# Altium PCB PCB2.PcbDoc
Units mil, origin at the board's own origin, x right, y up, seen from the top; angles counter-clockwise.
Board outline 3255 x 2500 mil, 2 copper layers (Top Layer, Bottom Layer); 17 components, 7 nets, 39 pads, 1 vias.
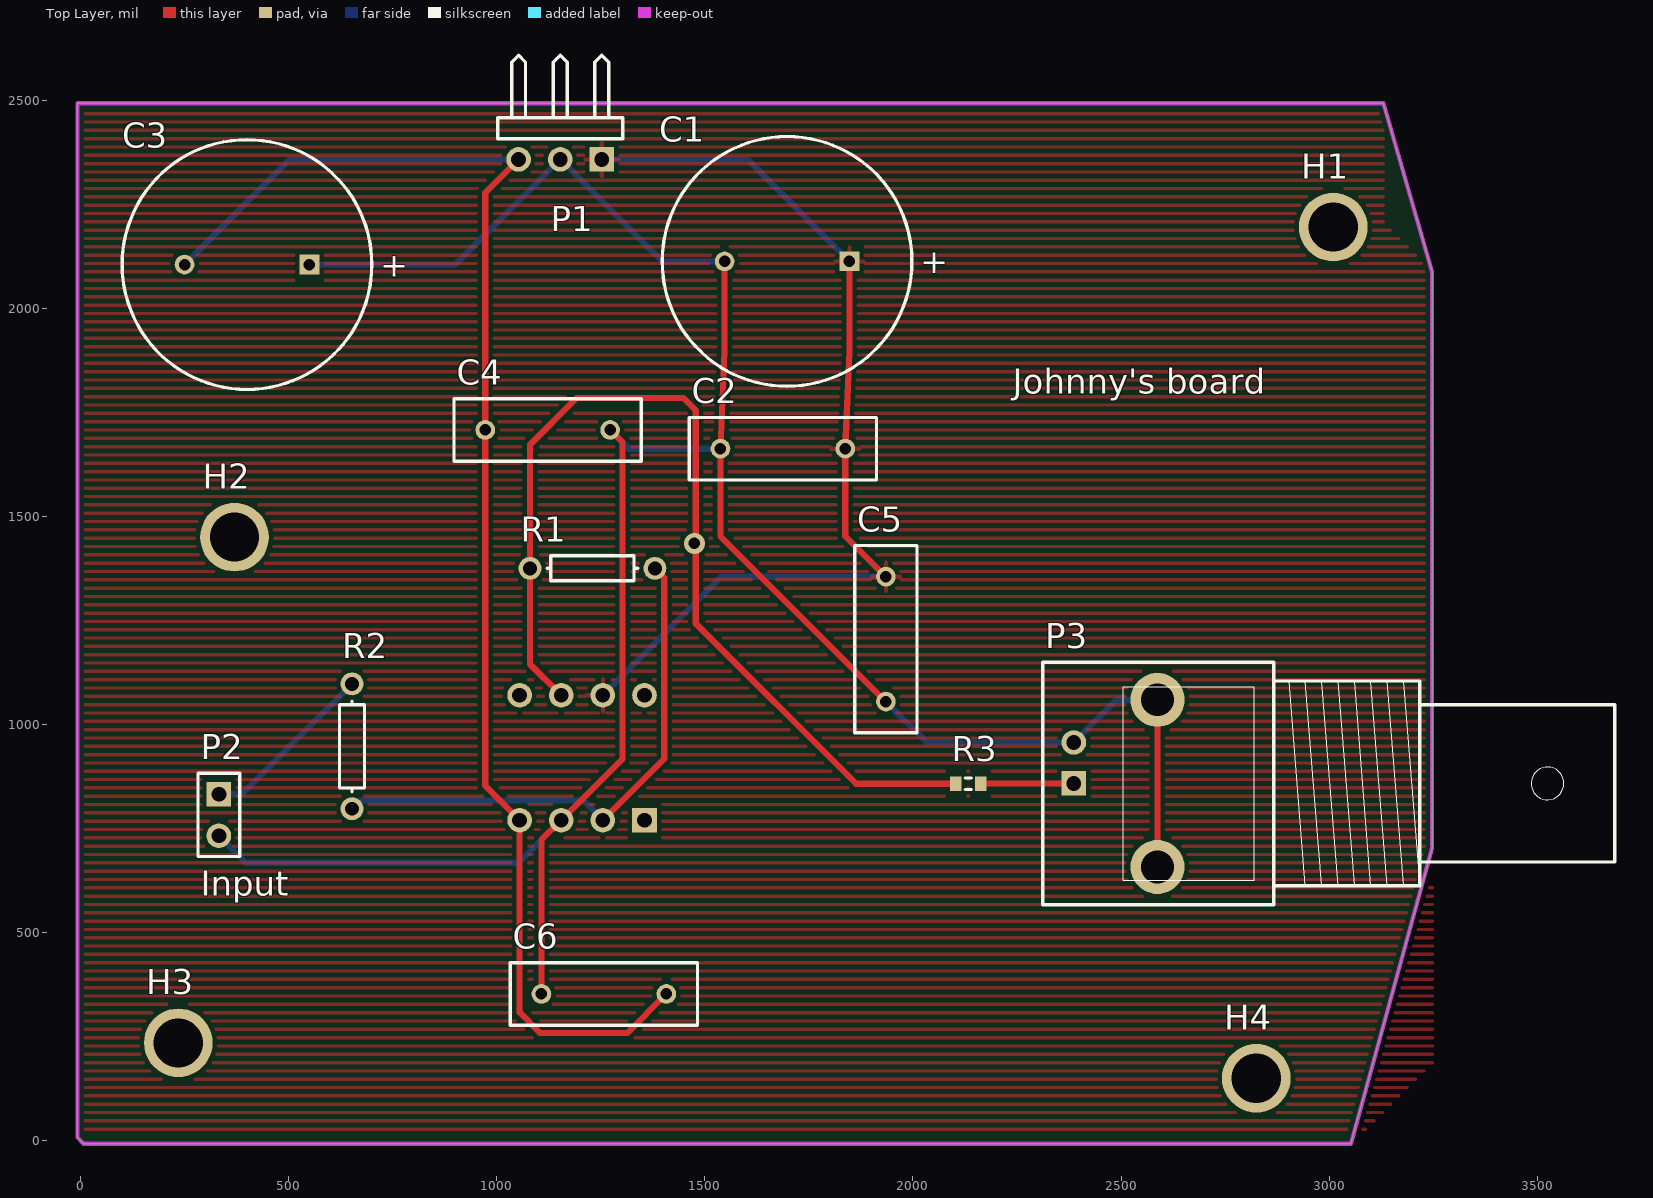
[diagram p0: Top Layer view]
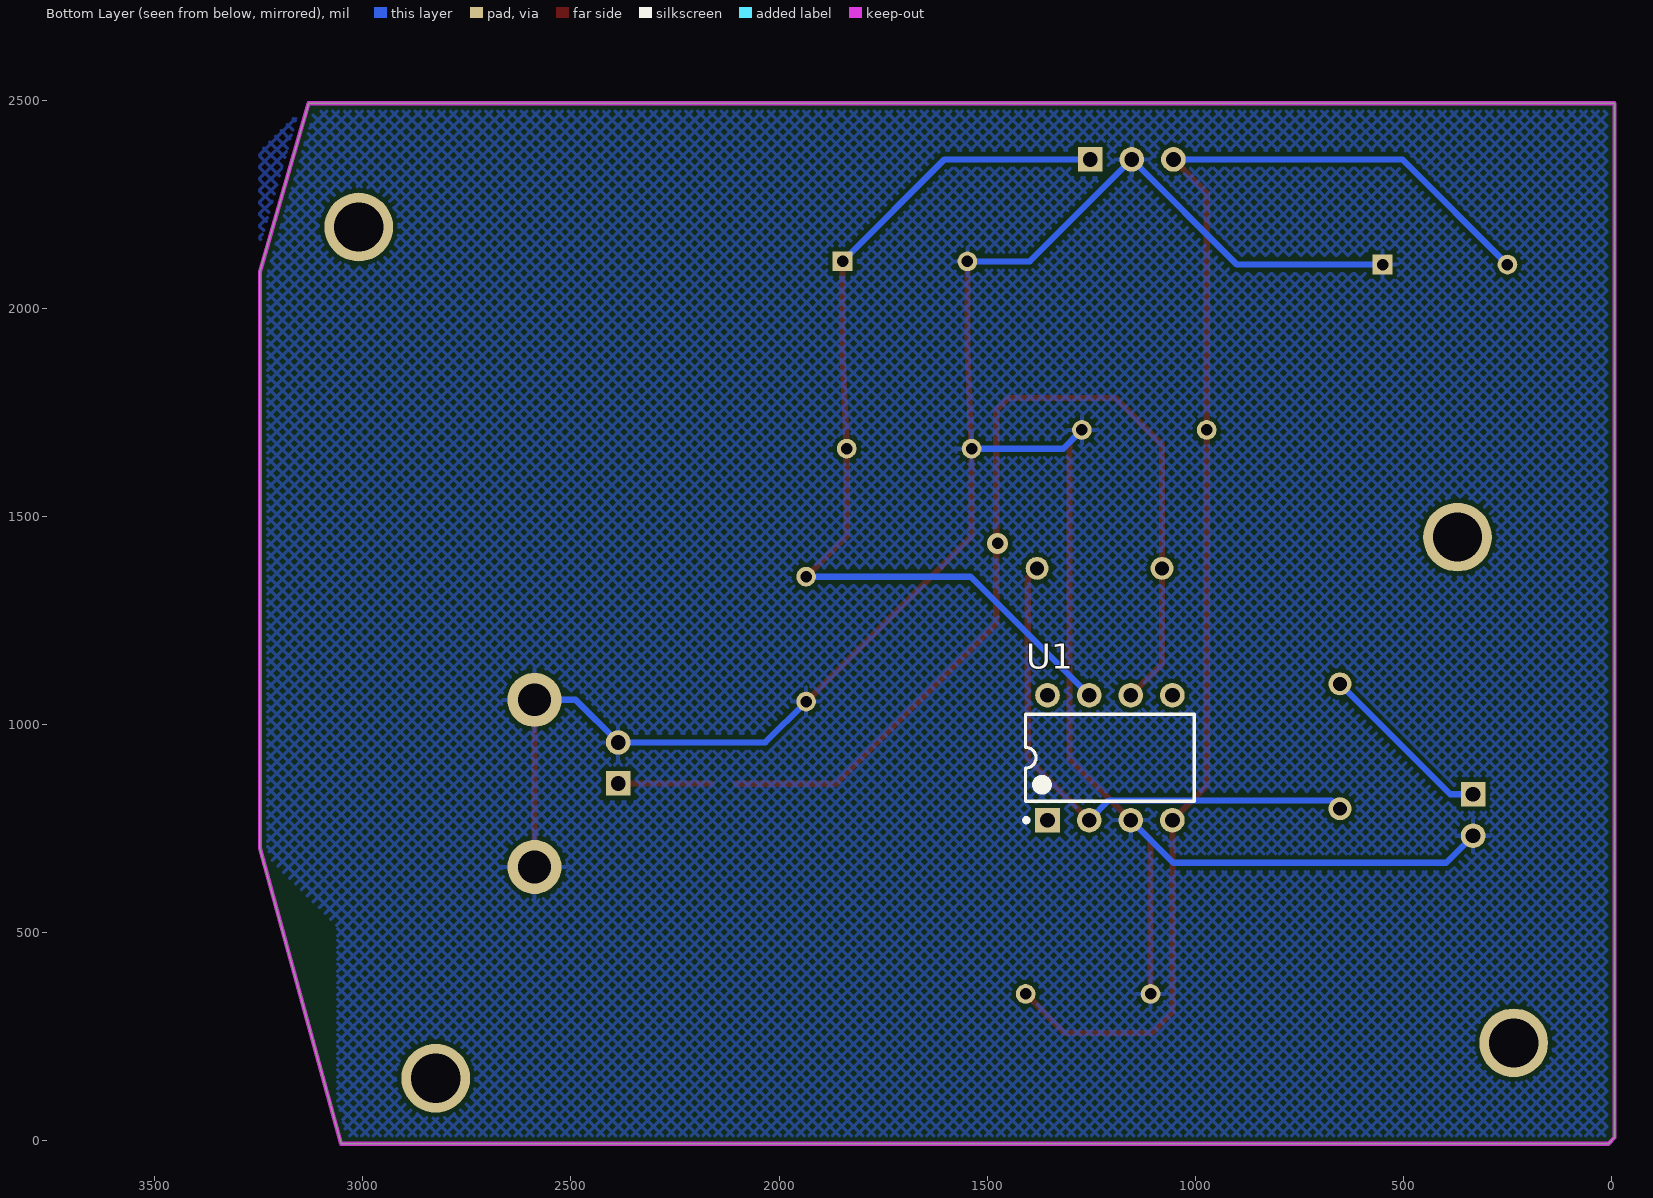
[diagram p1: Bottom Layer view, seen from below]

## Layer stack, top to bottom
Top Solder: solder mask 0.4, Solder Resist, Dk 3.5
Top Layer: signal copper 1.4
Dielectric 1: dielectric 12.6, FR-4, Dk 4.8
Bottom Layer: signal copper 1.4
Bottom Solder: solder mask 0.4, Solder Resist, Dk 3.5

## Board outline
7.5,-7.5 -7.5,7.5 -7.5,2492.5 3130.5,2492.5 3247.5,2087.5 3247.5,702.5 3052.5,-7.5

## Design rules (kind name [scope] priority, off if disabled: settings)
Clearance [All] p1: gap=10 ignorepadtopadclearanceinfootprint=FALSE except(0: Arc-Hole Track-Hole SMDPad-Hole THPad-Hole Via-Hole Fill-Hole Poly-Hole Region-Hole Text-Hole)
PolygonConnect [All] p1: connectstyle=Relief reliefconductorwidth=10 reliefentries=4 polygonreliefangle="90 Angle" airgapwidth=10
RoutingVias [All] p1: holewidth=28 width=50 viastyle="Through Hole" minholewidth=28 minwidth=50 maxholewidth=28 maxwidth=50
SolderMaskExpansion [All] p1: expansion=4 istentingtop=FALSE
Width [All] p1: maxlimit=20 minlimit=10 preferedwidth=15 minimp=50.000000 maximp=50.000000 favimp=50.000000
30 further rules are at their usual default settings.

## Components (designator, comment, footprint, x,y, rotation, side; value= is the part's Value field where it differs from the comment)
C1 "Cap Pol1" RB7.6-15 1697.5,2112.5 r0 top value=100uF
C2 "Cap" RAD-0.3 1687.5,1662.5 r0 top value=100nF
C3 "Cap Pol1" RB7.6-15 400,2105 r0 top value=100uF
C4 "Cap" RAD-0.3 1122.5,1707.5 r180 top value=100nF
C5 "Cap" RAD-0.3 1935,1205 r90 top value=100nF
C6 "Cap" RAD-0.3 1257.5,352.5 r0 top value=100nF
H1 "Hole 3mm" "Hole 3mm" 3010,2195 r0 top
H2 "Hole 3mm" "Hole 3mm" 370,1450 r0 top
H3 "Hole 3mm" "Hole 3mm" 235,235 r0 top
H4 "Hole 3mm" "Hole 3mm" 2825,150 r0 top
P1 "Power" HDR1X3H 1252.5,2357.5 r180 top
P2 "Input" HDR1X2 332.5,832.5 r270 top
P3 "BNC" "BNC_RA CON" 2386.71,858.29 r180 top
R1 "Res1" AXIAL-0.3 1230,1375 r180 top value=10K
R2 "Res1" AXIAL-0.3 652.5,947.5 r270 top value=1K
R3 "Res3" J1-0603 2132.97,857.5 r0 top value=50
U1 "Op Amp" DIP-8 1205,920 r90 bottom

## Footprints (in the part's own frame and the unit in brackets; to place one, negate y for a bottom-side part, rotate by r counter-clockwise, add the part's x,y. Pads: shape width x height; smd on the part's side, far side on the other; paste and mask are expansions set on the pad)
AXIAL-0.3 [mm] "Axial Device, Thru-Hole; 2 Leads; 0.3 in Pin Spacing"
  round 1.4 hole 0.85: 1(-3.81,0) 2(3.81,0)
  silkscreen extent -2.77,-0.76 2.77,0.76
"BNC_RA CON" [mm] "Connector; BNC Elbow"
  rect 1.5x1.5 hole 0.9: 1(0,0)
  round 3.3 hole 2: 2(-5.1,5.1) 2(-5.1,-5.1)
  round 1.5 hole 0.9: 2(0,-2.5)
  silkscreen extent -33,-7.4 1.9,7.4
DIP-8 [mm] "DIP; 8 Leads; Row Spacing 7.62 mm; Pitch 2.54 mm"
  rect 1.5x1.5 hole 0.9: 1(-3.81,3.81)
  round 1.5 hole 0.9: 2(-3.81,1.27) 3(-3.81,-1.27) 4(-3.81,-3.81) 5(3.81,-3.81) 6(3.81,-1.27) 7(3.81,1.27) 8(3.81,3.81)
  silkscreen extent -3.93,-5.15 2.65,5.24, body extent -3.6,-5.15 3.6,5.15, height 5.08
HDR1X2 [mm] "Connector; Header; 2 Position"
  rect 1.5x1.5 hole 0.9: 1(0,0)
  round 1.5 hole 0.9: 2(2.54,0)
  silkscreen extent -1.27,-1.27 3.81,1.27
HDR1X3H [mm] "Connector; Header; 3 Position; Right Angle"
  rect 1.5x1.5 hole 0.9: 1(0,0)
  round 1.5 hole 0.9: 2(2.54,0) 3(5.08,0)
  silkscreen extent -1.27,-6.35 6.35,-1.27
"Hole 3mm" [mil]
  round 165 hole 118.11: 1(0,0)
J1-0603 [mm] "Chip Resistor, Body 1.6x0.8mm, IPC High Density"
  rect 0.7x0.9 smd: 1(-0.75,0) 2(0.75,0)
  silkscreen extent -0.2,-0.35 0.2,0.35, body extent -0.85,-0.48 0.85,0.48, height 0.9
RAD-0.3 [mm] "Radial Cap, Thru-Hole; 2 Leads; 0.3 in Pin Spacing"
  round 1.2 hole 0.7: 1(-3.81,0) 2(3.81,0)
  silkscreen extent -5.71,-1.91 5.71,1.91
RB7.6-15 [mm] "Polarized Capacitor (Radial); 2 Leads"
  rect 1.2x1.2 hole 0.7: 1(3.81,0)
  round 1.2 hole 0.7: 2(-3.81,0)
  silkscreen extent -7.62,-7.62 7.62,7.62

## Part data
C1 C3: "Polarized Capacitor (Radial)", LatestRevisionDate=17-Jul-2002, LatestRevisionNote="Re-released for DXP Platform.", PackageDescription="Polarized Capacitor (Radial); 2 Leads", PackageReference=RB7.6-15, Published=8-Jun-2000, Publisher="Altium Limited"
C2 C4 C5 C6: "Capacitor", LatestRevisionDate=17-Jul-2002, LatestRevisionNote="Re-released for DXP Platform.", PackageDescription="Radial Cap, Thru-Hole; 2 Leads; 0.3 in Pin Spacing", PackageReference=RAD-0.3, Published=8-Jun-2000, Publisher="Altium Limited"
P1: library part "Header 3H", "Header, 3-Pin, Right Angle", LatestRevisionDate=17-Jul-2002, LatestRevisionNote="Re-released for DXP Platform.", Publisher="Altium Limited"
P2: library part "Header 2", "Header, 2-Pin", LatestRevisionDate=17-Jul-2002, LatestRevisionNote="Re-released for DXP Platform.", Publisher="Altium Limited"
P3: "BNC Elbow Connector", LatestRevisionDate=17-Jul-2002, LatestRevisionNote="Re-released for DXP Platform.", Publisher="Altium Limited"
R1 R2 R3: "Resistor", Published=8-Jun-2000, Publisher="Altium Limited"
  R1 R2: LatestRevisionDate=17-Jul-2002, LatestRevisionNote="Re-released for DXP Platform.", PackageDescription="Axial Device, Thru-Hole; 2 Leads; 0.3 in Pin Spacing", PackageReference=AXIAL-0.3
  R3: LatestRevisionDate=29-May-2009, LatestRevisionNote="IPC-7351 Footprint Added.", PackageDescription="Chip Resistor", PackageReference=J1-0603
U1: "FET Operational Amplifier", ComponentLink1Description="Manufacturer Link", ComponentLink1URL=http://www.analog.com/, DatasheetVersion="REV. B", LatestRevisionDate=17-Jul-2002, LatestRevisionNote="Re-released for DXP Platform.", PackageDescription="Can; 8 Leads; Pin Circle Dia. 5.08 mm; Lead Dia. 0.53 mm (max)", PackageReference=H-08A, PackageVersion=1990, Published=8-Jun-2000, Publisher="Altium Limited"

## Via types
v1: diameter 50, hole 28, Top Layer to Bottom Layer, 1 vias

## Nets (pads, with @x,y where several pads share a name; then routed paths per layer and width w, separated by ;. In a path a pad name is that pad's centre, name@x,y a point inside that pad or via, vN(x,y) a via of type N, cw(c..) or ccw(c..) an arc to the next point about the centre after c; other vN are vias at no path point)
+12V: C1.1 C2.2 C5.2 P1.1 U1.7 | length 2292.6
  Top Layer w15: C1.1 1847.5,1897.5 C2.2 1837.5,1452.5 C5.2
  Bottom Layer w15: P1.1 1602.5,2357.5 C1.1 ; U1.7 1540,1355 C5.2
-12V: C3.2 C4.2 C6.2 P1.3 U1.4 | length 3435.8
  Top Layer w15: P1.3 972.5,2277.5 C4.2 972.5,852.5 U1.4 1055,308 1104.5,258.5 1313.5,258.5 C6.2
  Bottom Layer w15: C3.2 502.5,2357.5 P1.3
GND: C1.2 C2.1 C3.1 C4.1 C5.1 C6.1 P1.2 P2.2 P3.2 U1.3 | length 6186.8
  Top Layer w15: C6.1 1107.5,722.5 U1.3 1302.5,917.5 1302.5,1677.5 C4.1 ; C1.2 1547.5,1897.5 C2.1 1537.5,1452.5 C5.1 ; P3.2@2587.5,657.5 P3.2@2587.5,1059.07
  Bottom Layer w15: P2.2 397.5,667.5 1052.5,667.5 U1.3 ; C3.1 900,2105 P1.2 1397.5,2112.5 C1.2 ; C4.1 1317.5,1662.5 C2.1 ; C5.1 2033.29,956.71 2386.71,956.71 2489.07,1059.07 P3.2@2587.5,1059.07
INPUT: P2.1 R2.1 | length 429.8
  Bottom Layer w15: P2.1 387.5,832.5 R2.1
NetP3_1: P3.1 R3.2 | length 225
  Top Layer w15: R3.2 2162.5,858.29 P3.1
NetR1_1: R1.1 R2.2 U1.2 | length 1305.9
  Top Layer w15: U1.2 1402.5,917.5 1402.5,1352.5 R1.1
  Bottom Layer w15: R2.2 672.5,817.5 1207.5,817.5 U1.2
NetR1_2: R1.2 R3.1 U1.6 | length 2387
  Top Layer w15: U1.6 1080,1145 R1.2 1080,1672 1192.5,1784.5 1448.5,1784.5 1478.5,1754.5 1478.5,1242.5 1863.5,857.5 R3.1
  other v1: 1475,1435
pads on no net: H1.1 H2.1 H3.1 H4.1 U1.1 U1.5 U1.8

## Polygon pours and split planes (outlines as drawn)
GND on Bottom Layer "GND_L02_P000" (hatched 45Degree grid 20 track 8, pour order 0): 0,0 -7.5,7.5 -7.5,2492.5 3130.5,2492.5 3247.5,2375.5 3247.5,702.5 3060,515 3060,-10 3057.5,-7.5 3052.5,-7.5
+12V on Top Layer "+12V_L01_P001" (hatched Horizontal grid 20 track 8, pour order 1): -7.5,7.5 -7.5,2492.5 3130.5,2492.5 3130.5,2204.5 3247.5,2087.5 3247.5,187.5 3052.5,-7.5

## Keep-outs
Keep-Out Layer:
  lines w10: -7.5,7.5 -7.5,2492.5 297.5,2492.5 3130.5,2492.5 3247.5,2087.5 3247.5,702.5 3052.5,-7.5 7.5,-7.5 -7.5,7.5

## Silkscreen, mask and mechanical layers (free items; w line width, h text height)
Top Overlay:
  text "Johnny's board" at 2240,1794.99 h60

## Text inside footprints (layer, text, board x,y; h text height)
C1: Top Overlay "+" at 2017.65,2083.49 h59.06
C3: Top Overlay "+" at 720.15,2075.99 h59.06